# Altium PCB PCB1.PcbDoc
Units mm, origin at the board's own origin, x right, y up, seen from the top; angles counter-clockwise.
Board outline 114.6 x 81.6 mm, 2 copper layers (Top Layer, Bottom Layer); 60 components, 22 nets, 279 pads, 0 vias.
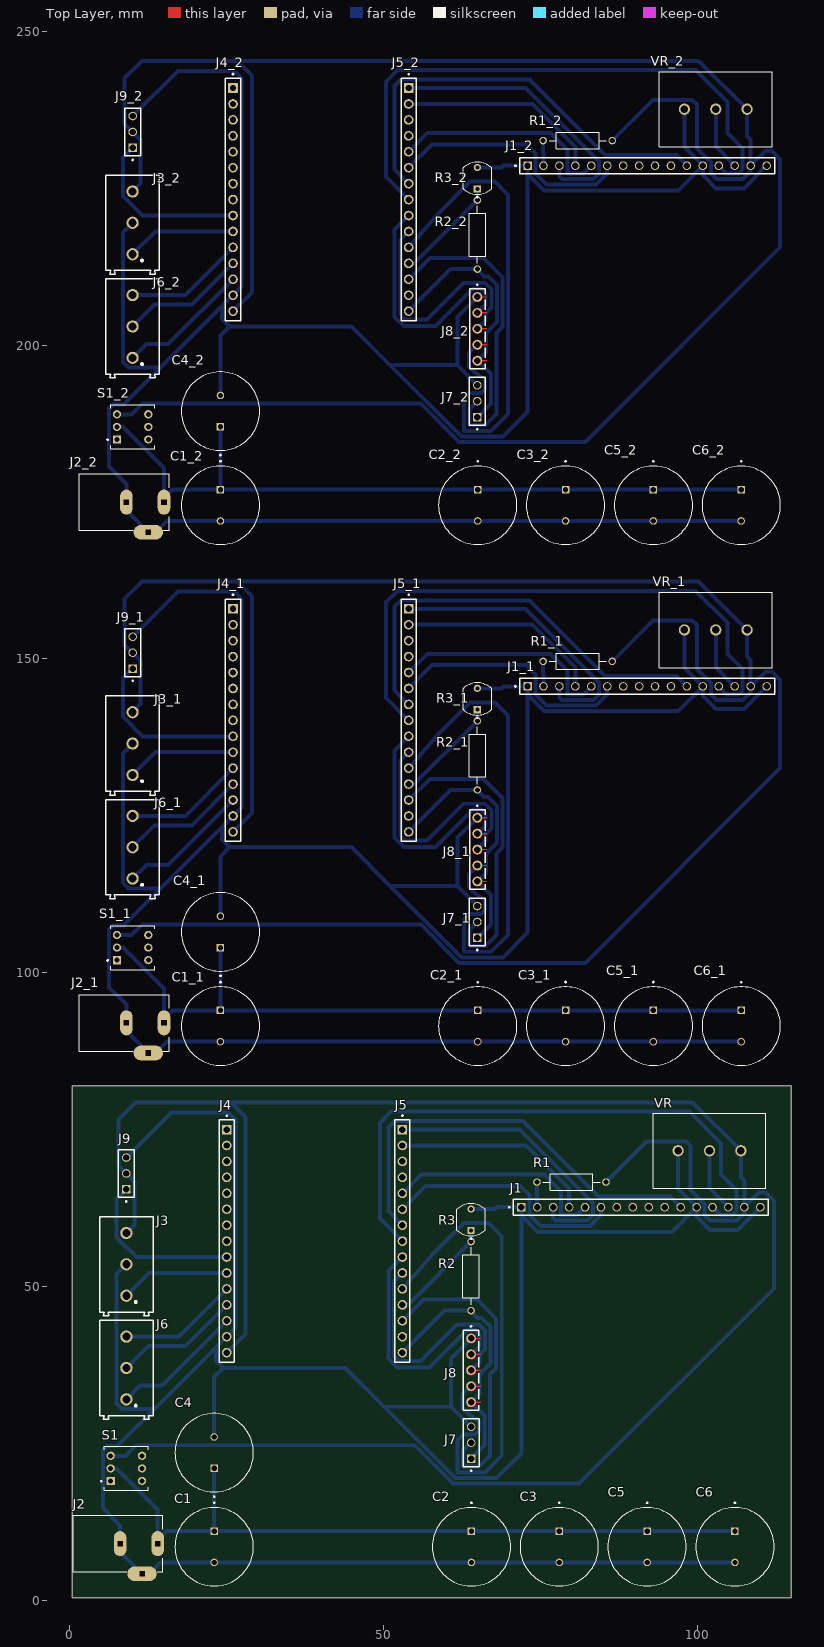
[diagram p0: Top Layer view]
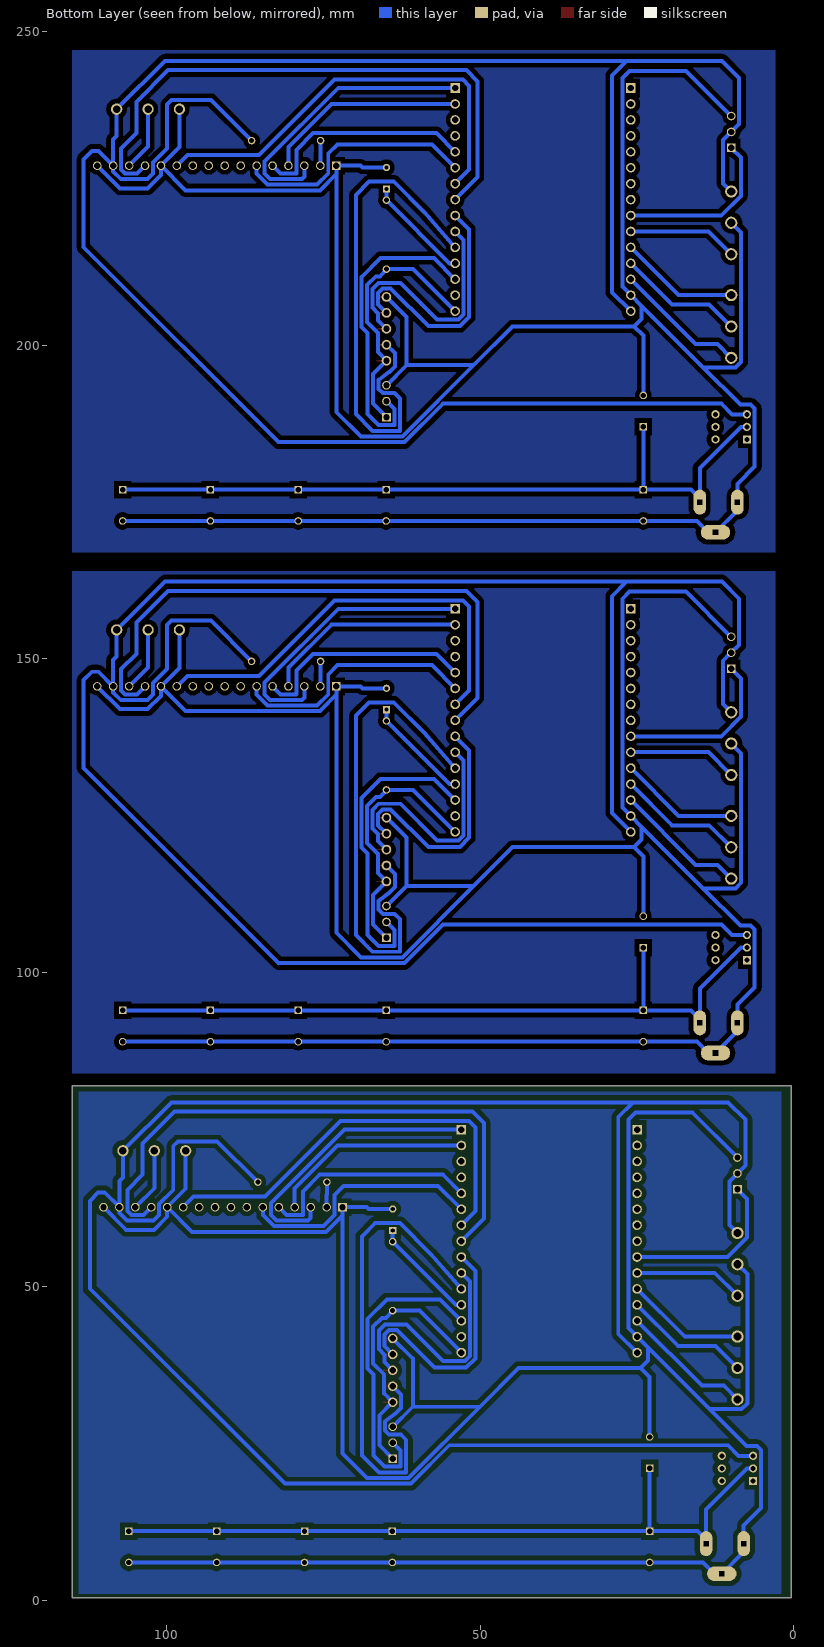
[diagram p1: Bottom Layer view, seen from below]

## Layer stack, top to bottom
Top Solder: solder mask 0.0102, Solder Resist, Dk 3.5
Top Layer: signal copper 0.0356
Dielectric 1: dielectric 0.32, FR-4, Dk 4.8
Bottom Layer: signal copper 0.0356
Bottom Solder: solder mask 0.0102, Solder Resist, Dk 3.5

## Board outline
0.4,0.4 115,0.4 115,82 0.4,82

## Design rules (kind name [scope] priority, off if disabled: settings)
Clearance [All] p1: gap=0.254 ignorepadtopadclearanceinfootprint=FALSE except(0.762: Arc-Fill Arc-Poly Arc-Region Track-Fill Track-Poly Track-Region SMDPad-Fill SMDPad-Poly SMDPad-Region THPad-Fill THPad-Poly THPad-Region Via-Fill Via-Poly Via-Region Fill-Fill Fill-Poly Fill-Region Poly-Poly Poly-Region Region-Region)
PolygonConnect [All] p1: connectstyle=Relief reliefconductorwidth=0.254 reliefentries=4 polygonreliefangle="90 Angle" airgapwidth=0.254
RoutingLayers [All] p1: top layer_v5=FALSE bottom layer_v5=TRUE
RoutingVias [All] p1: holewidth=0.711 width=1.27 viastyle="Through Hole" minholewidth=0.711 minwidth=1.27 maxholewidth=0.711 maxwidth=1.27
SolderMaskExpansion [All] p1: expansion=0.102 istentingtop=FALSE
Width [All] p1: maxlimit=1.016 minlimit=0.508 preferedwidth=0.635
29 further rules are at their usual default settings.

## Classes and differential pairs
component class Sheet1: C1 C2 C3 C4 C5 C6 J1 J2 J3 J4 J5 J6 J7 J8 J9 R1 R2 R3 S1 VR

## Components (designator, comment, footprint, x,y, rotation, side; value= is the part's Value field where it differs from the comment)
C1 "2200uF" CAPPRD500W60D1250H2000 23,8.5 r270 top
C1_1 "2200uF" CAPPRD500W60D1250H2000 24,91.5 r270 top (schematic designator C1)
C1_2 "2200uF" CAPPRD500W60D1250H2000 24,174.5 r270 top (schematic designator C1)
C2 "2200uF" CAPPRD500W60D1250H2000 64,8.5 r270 top
C2_1 "2200uF" CAPPRD500W60D1250H2000 65,91.5 r270 top (schematic designator C2)
C2_2 "2200uF" CAPPRD500W60D1250H2000 65,174.5 r270 top (schematic designator C2)
C3 "2200uF" CAPPRD500W60D1250H2000 78,8.5 r270 top
C3_1 "2200uF" CAPPRD500W60D1250H2000 79,91.5 r270 top (schematic designator C3)
C3_2 "2200uF" CAPPRD500W60D1250H2000 79,174.5 r270 top (schematic designator C3)
C4 "2200uF" CAPPRD500W60D1250H2000 23,23.5 r90 top
C4_1 "2200uF" CAPPRD500W60D1250H2000 24,106.5 r90 top (schematic designator C4)
C4_2 "2200uF" CAPPRD500W60D1250H2000 24,189.5 r90 top (schematic designator C4)
C5 "2200uF" CAPPRD500W60D1250H2000 92,8.5 r270 top
C5_1 "2200uF" CAPPRD500W60D1250H2000 93,91.5 r270 top (schematic designator C5)
C5_2 "2200uF" CAPPRD500W60D1250H2000 93,174.5 r270 top (schematic designator C5)
C6 "2200uF" CAPPRD500W60D1250H2000 106,8.5 r270 top
C6_1 "2200uF" CAPPRD500W60D1250H2000 107,91.5 r270 top (schematic designator C6)
C6_2 "2200uF" CAPPRD500W60D1250H2000 107,174.5 r270 top (schematic designator C6)
J1 "1602 LCD" SAMTEC_TSW-116-08-F-S 71.944,62.626 r0 top
J1_1 "1602 LCD" SAMTEC_TSW-116-08-F-S 72.944,145.626 r0 top (schematic designator J1)
J1_2 "1602 LCD" SAMTEC_TSW-116-08-F-S 72.944,228.626 r0 top (schematic designator J1)
J2 "DC-005" NINIGI_DC-005 11.5,9 r0 top
J2_1 "DC-005" NINIGI_DC-005 12.5,92 r0 top (schematic designator J2)
J2_2 "DC-005" NINIGI_DC-005 12.5,175 r0 top (schematic designator J2)
J3 "" 691213710003 9,53.519 r90 top
J3_1 "" 691213710003 10,136.519 r90 top (schematic designator J3)
J3_2 "" 691213710003 10,219.519 r90 top (schematic designator J3)
J4 "ESP32 NodeMCU left" SAMTEC_SSQ-115-X-X-S 25,57.22 r270 top
J4_1 "ESP32 NodeMCU left" SAMTEC_SSQ-115-X-X-S 26,140.22 r270 top (schematic designator J4)
J4_2 "ESP32 NodeMCU left" SAMTEC_SSQ-115-X-X-S 26,223.22 r270 top (schematic designator J4)
J5 "ESP32 NodeMCU right" SAMTEC_SSQ-115-X-X-S 53,57.22 r270 top
J5_1 "ESP32 NodeMCU right" SAMTEC_SSQ-115-X-X-S 54,140.22 r270 top (schematic designator J5)
J5_2 "ESP32 NodeMCU right" SAMTEC_SSQ-115-X-X-S 54,223.22 r270 top (schematic designator J5)
J6 "Relay module" 691213710003 9,37 r90 top
J6_1 "Relay module" 691213710003 10,120 r90 top (schematic designator J6)
J6_2 "Relay module" 691213710003 10,203 r90 top (schematic designator J6)
J7 "DHT11" SAMTEC_TSW-103-08-F-S 63.944,22.546 r90 top
J7_1 "DHT11" SAMTEC_TSW-103-08-F-S 64.944,105.546 r90 top (schematic designator J7)
J7_2 "DHT11" SAMTEC_TSW-103-08-F-S 64.944,188.546 r90 top (schematic designator J7)
J8 "R558S" SAMTEC_MTLW-105-05-G-S-190 63.944,36.626 r90 top
J8_1 "R558S" SAMTEC_MTLW-105-05-G-S-190 64.944,119.626 r90 top (schematic designator J8)
J8_2 "R558S" SAMTEC_MTLW-105-05-G-S-190 64.944,202.626 r90 top (schematic designator J8)
J9 "Servo" SAMTEC_TSW-103-08-F-S 9,65.46 r90 top
J9_1 "Servo" SAMTEC_TSW-103-08-F-S 10,148.46 r90 top (schematic designator J9)
J9_2 "Servo" SAMTEC_TSW-103-08-F-S 10,231.46 r90 top (schematic designator J9)
R1 "1K" RESAD1100W55L680D260 79.944,66.626 r180 top
R1_1 "1K" RESAD1100W55L680D260 80.944,149.626 r180 top (schematic designator R1)
R1_2 "1K" RESAD1100W55L680D260 80.944,232.626 r180 top (schematic designator R1)
R2 "10K" RESAD1100W55L680D260 63.944,51.626 r90 top
R2_1 "10K" RESAD1100W55L680D260 64.944,134.626 r90 top (schematic designator R2)
R2_2 "10K" RESAD1100W55L680D260 64.944,217.626 r90 top (schematic designator R2)
R3 "PDV-P8103" PHODET_PDV-P8103 63.944,60.626 r90 top
R3_1 "PDV-P8103" PHODET_PDV-P8103 64.944,143.626 r90 top (schematic designator R3)
R3_2 "PDV-P8103" PHODET_PDV-P8103 64.944,226.626 r90 top (schematic designator R3)
S1 "TL2230EEF100" SW_TL2230EEF100 9,21 r90 top
S1_1 "TL2230EEF100" SW_TL2230EEF100 10,104 r90 top (schematic designator S1)
S1_2 "TL2230EEF100" SW_TL2230EEF100 10,187 r90 top (schematic designator S1)
VR "10K" P160 101.944,71.626 r0 top
VR_1 "10K" P160 102.944,154.626 r0 top (schematic designator VR)
VR_2 "10K" P160 102.944,237.626 r0 top (schematic designator VR)

## Footprints (in the part's own frame and the unit in brackets; to place one, negate y for a bottom-side part, rotate by r counter-clockwise, add the part's x,y. Pads: shape width x height; smd on the part's side, far side on the other; paste and mask are expansions set on the pad)
691213710003 [mm]
  round 1.95 hole 1.3: 1(-5,0) 2(0,0) 3(5,0)
  silkscreen extent -8.2,-4.25 7.6,4.25
CAPPRD500W60D1250H2000 [mm]
  round 1.2 hole 0.85: N(2.5,0)
  rect 1.2x1.2 hole 0.85: P(-2.5,0)
  silkscreen extent -7.1,-6.25 6.25,6.25, body extent -6.25,-6.25 6.25,6.25, height 20
NINIGI_DC-005 [mm]
  oval 4.7x2.35 hole 0.8 square: 2(0,-4.8)
  oval 2x4 hole 0.8 square: 3(-3.5,0) 4(2.5,0)
  silkscreen extent -11,-4.5 3.3,4.5
P160 [mm]
  round 1.8 hole 1.2: 1(-5,0) 2(0,0) 3(5,0)
  silkscreen extent -9,-6 9,6
PHODET_PDV-P8103 [mm]
  rect 1.158x1.158 / inner round 1.158 / far side rect 1.158x1.158 hole 0.65: 1(-1.7,0)
  round 1.158 hole 0.65: 2(1.7,0)
  silkscreen extent -3.1,-2.27 2.58,2.27, body extent -2.54,-2.14 2.54,2.14, height 2.38
RESAD1100W55L680D260 [mm]
  round 1.2 hole 0.8: 1(-5.5,0) 2(5.5,0)
  silkscreen extent -4.58,-1.3 4.58,1.3, body extent -5.77,-1.2 5.77,1.2, height 2.4
SAMTEC_MTLW-105-05-G-S-190 [mm]
  round 1.52 hole 1.02: 01(5.08,0) 02(2.54,0) 03(0,0) 04(-2.54,0) 05(-5.08,0)
  Top Layer region: 5.159,0.756 5.238,0.743 5.315,0.723 5.389,0.694 5.46,0.658 5.527,0.615 5.589,0.565 5.645,0.509 5.695,0.447 5.738,0.38 5.774,0.309 5.803,0.235 5.823,0.158 5.836,0.079 5.84,0 5.839,-0.038 5.836,-0.076 5.832,-0.113 5.825,-0.151 5.817,-0.187 5.807,-0.224 5.795,-0.259 5.781,-0.294 5.766,-0.329 5.749,-0.363 5.73,-0.395 5.71,-0.427 5.688,-0.458 5.665,-0.487 5.64,-0.516 5.614,-0.543 5.586,-0.569 5.557,-0.593 5.528,-0.616 5.497,-0.638 5.465,-0.658 5.432,-0.676 5.398,-0.692 5.363,-0.707 5.328,-0.721 5.292,-0.732 5.256,-0.742 5.219,-0.75 5.182,-0.756 5.145,-0.76 5.145,-1.53 5.015,-1.53 5.015,-0.76 4.978,-0.756 4.941,-0.75 4.904,-0.742 4.868,-0.732 4.832,-0.721 4.797,-0.707 4.762,-0.692 4.728,-0.676 4.695,-0.658 4.663,-0.638 4.632,-0.616 4.603,-0.593 4.574,-0.569 4.546,-0.543 4.52,-0.516 4.495,-0.487 4.472,-0.458 4.45,-0.427 4.43,-0.395 4.411,-0.363 4.394,-0.329 4.379,-0.294 4.365,-0.259 4.353,-0.224 4.343,-0.187 4.335,-0.151 4.328,-0.113 4.324,-0.076 4.321,-0.038 4.32,0 4.324,0.079 4.337,0.158 4.357,0.235 4.386,0.309 4.422,0.38 4.465,0.447 4.515,0.509 4.571,0.565 4.633,0.615 4.7,0.658 4.771,0.694 4.845,0.723 4.922,0.743 5.001,0.756 5.08,0.76
  Top Layer region: 2.619,0.756 2.698,0.743 2.775,0.723 2.849,0.694 2.92,0.658 2.987,0.615 3.049,0.565 3.105,0.509 3.155,0.447 3.198,0.38 3.234,0.309 3.263,0.235 3.283,0.158 3.296,0.079 3.3,0 3.299,-0.038 3.296,-0.076 3.292,-0.113 3.285,-0.151 3.277,-0.187 3.267,-0.224 3.255,-0.259 3.241,-0.294 3.226,-0.329 3.209,-0.363 3.19,-0.395 3.17,-0.427 3.148,-0.458 3.125,-0.487 3.1,-0.516 3.074,-0.543 3.046,-0.569 3.017,-0.593 2.988,-0.616 2.957,-0.638 2.925,-0.658 2.892,-0.676 2.858,-0.692 2.823,-0.707 2.788,-0.721 2.752,-0.732 2.716,-0.742 2.679,-0.75 2.642,-0.756 2.605,-0.76 2.605,-1.53 2.475,-1.53 2.475,-0.76 2.438,-0.756 2.401,-0.75 2.364,-0.742 2.328,-0.732 2.292,-0.721 2.257,-0.707 2.222,-0.692 2.188,-0.676 2.155,-0.658 2.123,-0.638 2.092,-0.616 2.063,-0.593 2.034,-0.569 2.006,-0.543 1.98,-0.516 1.955,-0.487 1.932,-0.458 1.91,-0.427 1.89,-0.395 1.871,-0.363 1.854,-0.329 1.839,-0.294 1.825,-0.259 1.813,-0.224 1.803,-0.187 1.795,-0.151 1.788,-0.113 1.784,-0.076 1.781,-0.038 1.78,0 1.784,0.079 1.797,0.158 1.817,0.235 1.846,0.309 1.882,0.38 1.925,0.447 1.975,0.509 2.031,0.565 2.093,0.615 2.16,0.658 2.231,0.694 2.305,0.723 2.382,0.743 2.461,0.756 2.54,0.76
  Top Layer region: 0.079,0.756 0.158,0.743 0.235,0.723 0.309,0.694 0.38,0.658 0.447,0.615 0.509,0.565 0.565,0.509 0.615,0.447 0.658,0.38 0.694,0.309 0.723,0.235 0.743,0.158 0.756,0.079 0.76,0 0.759,-0.038 0.756,-0.076 0.752,-0.113 0.745,-0.151 0.737,-0.187 0.727,-0.224 0.715,-0.259 0.701,-0.294 0.686,-0.329 0.669,-0.363 0.65,-0.395 0.63,-0.427 0.608,-0.458 0.585,-0.487 0.56,-0.516 0.534,-0.543 0.506,-0.569 0.477,-0.593 0.448,-0.616 0.417,-0.638 0.385,-0.658 0.352,-0.676 0.318,-0.692 0.283,-0.707 0.248,-0.721 0.212,-0.732 0.176,-0.742 0.139,-0.75 0.102,-0.756 0.065,-0.76 0.065,-1.53 -0.065,-1.53 -0.065,-0.76 -0.102,-0.756 -0.139,-0.75 -0.176,-0.742 -0.212,-0.732 -0.248,-0.721 -0.283,-0.707 -0.318,-0.692 -0.352,-0.676 -0.385,-0.658 -0.417,-0.638 -0.448,-0.616 -0.477,-0.593 -0.506,-0.569 -0.534,-0.543 -0.56,-0.516 -0.585,-0.487 -0.608,-0.458 -0.63,-0.427 -0.65,-0.395 -0.669,-0.363 -0.686,-0.329 -0.701,-0.294 -0.715,-0.259 -0.727,-0.224 -0.737,-0.187 -0.745,-0.151 -0.752,-0.113 -0.756,-0.076 -0.759,-0.038 -0.76,0 -0.756,0.079 -0.743,0.158 -0.723,0.235 -0.694,0.309 -0.658,0.38 -0.615,0.447 -0.565,0.509 -0.509,0.565 -0.447,0.615 -0.38,0.658 -0.309,0.694 -0.235,0.723 -0.158,0.743 -0.079,0.756 0,0.76
  Top Layer region: -2.461,0.756 -2.382,0.743 -2.305,0.723 -2.231,0.694 -2.16,0.658 -2.093,0.615 -2.031,0.565 -1.975,0.509 -1.925,0.447 -1.882,0.38 -1.846,0.309 -1.817,0.235 -1.797,0.158 -1.784,0.079 -1.78,0 -1.781,-0.038 -1.784,-0.076 -1.788,-0.113 -1.795,-0.151 -1.803,-0.187 -1.813,-0.224 -1.825,-0.259 -1.839,-0.294 -1.854,-0.329 -1.871,-0.363 -1.89,-0.395 -1.91,-0.427 -1.932,-0.458 -1.955,-0.487 -1.98,-0.516 -2.006,-0.543 -2.034,-0.569 -2.063,-0.593 -2.092,-0.616 -2.123,-0.638 -2.155,-0.658 -2.188,-0.676 -2.222,-0.692 -2.257,-0.707 -2.292,-0.721 -2.328,-0.732 -2.364,-0.742 -2.401,-0.75 -2.438,-0.756 -2.475,-0.76 -2.475,-1.53 -2.605,-1.53 -2.605,-0.76 -2.642,-0.756 -2.679,-0.75 -2.716,-0.742 -2.752,-0.732 -2.788,-0.721 -2.823,-0.707 -2.858,-0.692 -2.892,-0.676 -2.925,-0.658 -2.957,-0.638 -2.988,-0.616 -3.017,-0.593 -3.046,-0.569 -3.074,-0.543 -3.1,-0.516 -3.125,-0.487 -3.148,-0.458 -3.17,-0.427 -3.19,-0.395 -3.209,-0.363 -3.226,-0.329 -3.241,-0.294 -3.255,-0.259 -3.267,-0.224 -3.277,-0.187 -3.285,-0.151 -3.292,-0.113 -3.296,-0.076 -3.299,-0.038 -3.3,0 -3.296,0.079 -3.283,0.158 -3.263,0.235 -3.234,0.309 -3.198,0.38 -3.155,0.447 -3.105,0.509 -3.049,0.565 -2.987,0.615 -2.92,0.658 -2.849,0.694 -2.775,0.723 -2.698,0.743 -2.619,0.756 -2.54,0.76
  Top Layer region: -5.001,0.756 -4.922,0.743 -4.845,0.723 -4.771,0.694 -4.7,0.658 -4.633,0.615 -4.571,0.565 -4.515,0.509 -4.465,0.447 -4.422,0.38 -4.386,0.309 -4.357,0.235 -4.337,0.158 -4.324,0.079 -4.32,0 -4.321,-0.038 -4.324,-0.076 -4.328,-0.113 -4.335,-0.151 -4.343,-0.187 -4.353,-0.224 -4.365,-0.259 -4.379,-0.294 -4.394,-0.329 -4.411,-0.363 -4.43,-0.395 -4.45,-0.427 -4.472,-0.458 -4.495,-0.487 -4.52,-0.516 -4.546,-0.543 -4.574,-0.569 -4.603,-0.593 -4.632,-0.616 -4.663,-0.638 -4.695,-0.658 -4.728,-0.676 -4.762,-0.692 -4.797,-0.707 -4.832,-0.721 -4.868,-0.732 -4.904,-0.742 -4.941,-0.75 -4.978,-0.756 -5.015,-0.76 -5.015,-1.53 -5.145,-1.53 -5.145,-0.76 -5.182,-0.756 -5.219,-0.75 -5.256,-0.742 -5.292,-0.732 -5.328,-0.721 -5.363,-0.707 -5.398,-0.692 -5.432,-0.676 -5.465,-0.658 -5.497,-0.638 -5.528,-0.616 -5.557,-0.593 -5.586,-0.569 -5.614,-0.543 -5.64,-0.516 -5.665,-0.487 -5.688,-0.458 -5.71,-0.427 -5.73,-0.395 -5.749,-0.363 -5.766,-0.329 -5.781,-0.294 -5.795,-0.259 -5.807,-0.224 -5.817,-0.187 -5.825,-0.151 -5.832,-0.113 -5.836,-0.076 -5.839,-0.038 -5.84,0 -5.836,0.079 -5.823,0.158 -5.803,0.235 -5.774,0.309 -5.738,0.38 -5.695,0.447 -5.645,0.509 -5.589,0.565 -5.527,0.615 -5.46,0.658 -5.389,0.694 -5.315,0.723 -5.238,0.743 -5.159,0.756 -5.08,0.76
  silkscreen extent -6.35,-1.24 7.1,1.24
SAMTEC_SSQ-115-X-X-S [mm]
  rect 1.53x1.53 hole 1.02: 01(-17.78,0)
  round 1.53 hole 1.02: 02(-15.24,0) 03(-12.7,0) 04(-10.16,0) 05(-7.62,0) 06(-5.08,0) 07(-2.54,0) 08(0,0) 09(2.54,0) 10(5.08,0) 11(7.62,0) 12(10.16,0) 13(12.7,0) 14(15.24,0) 15(17.78,0)
  silkscreen extent -20.1,-1.2 19.31,1.2
SAMTEC_TSW-103-08-F-S [mm]
  rect 1.37x1.37 hole 1.02: 01(0,0)
  round 1.37 hole 1.02: 02(2.54,0) 03(5.08,0)
  silkscreen extent -2.02,-1.27 6.35,1.27
SAMTEC_TSW-116-08-F-S [mm]
  rect 1.37x1.37 hole 1.02: 01(0,0)
  round 1.37 hole 1.02: 02(2.54,0) 03(5.08,0) 04(7.62,0) 05(10.16,0) 06(12.7,0) 07(15.24,0) 08(17.78,0) 09(20.32,0) 10(22.86,0) 11(25.4,0) 12(27.94,0) 13(30.48,0) 14(33.02,0) 15(35.56,0) 16(38.1,0)
  silkscreen extent -2.02,-1.27 39.37,1.27
SW_TL2230EEF100 [mm]
  rect 1.308x1.308 / inner round 1.308 / far side rect 1.308x1.308 hole 0.8: 1(-2,2.5)
  round 1.308 hole 0.8: 2(0,2.5) 3(2,2.5) 4(-2,-2.5) 5(0,-2.5) 6(2,-2.5)
  silkscreen extent -3.5,-3.5 3.5,4.1, body extent -3.5,-3.5 3.5,3.5, height 12.5

## Part data
C1 C1_1 C1_2 C2 C2_1 C2_2 C3 C3_1 C3_2 C4 C4_1 C4_2 C5 C5_1 C5_2 C6 C6_1 C6_2: library part EEUFR1C222, "Cap Aluminum Lytic 2200uF 16V 20% (12.5 X 20mm) Radial 5mm 2600mA 10000h 105C Bulk", Package="RADIAL-2 Panasonic", Availability="In Stock", Check_prices=https://www.snapeda.com/parts/EEUFR1C222/Panasonic/view-part/1469066/?ref=eda, MF=Panasonic, MP=EEUFR1C222, Price=None, SnapEDA_Link=https://www.snapeda.com/parts/EEUFR1C222/Panasonic/view-part/1469066/?ref=snap
J1 J1_1 J1_2: library part TSW-116-08-F-S, Package=None, Availability=Unavailable, MP=TSW-116-08-F-S, Price=None
J2 J2_1 J2_2: "DC Jack", Package=None, Availability=Unavailable, MP=DC-005, Price=None
J3 J3_1 J3_2 J6 J6_1 J6_2: library part 691213710003, "Serie 213 - 5,0mm pitch - Modular THT - Green - Horizontal cable entry Rising Cage Clamp 10mm height - 03p", Package=None, Check_prices=https://www.snapeda.com/parts/691213710003/Wurth+Electronics/view-part/?ref=eda, MF="Wurth Electronics", MP=691213710003, SnapEDA_Link=https://www.snapeda.com/parts/691213710003/Wurth+Electronics/view-part/?ref=snap
J4 J4_1 J4_2 J5 J5_1 J5_2: library part SSQ-115-X-X-S, "15 Position Receptacle Connector 0.100 (2.54mm) Through Hole Gold", Package=None, Availability="Not in stock", Check_prices=https://www.snapeda.com/parts/SSQ-115-23-G-S/Samtec/view-part/3249452/?ref=eda, MF=Samtec, MP=SSQ-115-23-G-S, Price=None, Purchase-URL=https://pricing.snapeda.com/search/part/SSQ-115-23-G-S/?ref=eda, SnapEDA_Link=https://www.snapeda.com/parts/SSQ-115-23-G-S/Samtec/view-part/3249452/?ref=snap
J7 J7_1 J7_2 J9 J9_1 J9_2: library part TSW-103-08-F-S, Package=None, Availability=Unavailable, MP=TSW-103-08-F-S, Price=None
J8 J8_1 J8_2: library part MTLW-105-05-G-S-190, Package=None, Availability=Unavailable, MP=MTLW-105-05-G-S-190, Price=None
R1 R1_1 R1_2 R2 R2_1 R2_2: library part MFR-25FBF52-1K, "1.07 kOhms Â±1% 0.25W, 1/4W Through Hole Resistor Axial - Metal Film", Package="RADIAL-2 YAGEO", Check_prices=https://www.snapeda.com/parts/MFR-25FBF52-1K/Yageo/view-part/?ref=eda, MF=Yageo, MP=MFR-25FBF52-1K, SnapEDA_Link=https://www.snapeda.com/parts/MFR-25FBF52-1K/Yageo/view-part/?ref=snap
R3 R3_1 R3_2: "CdS Cells 520nm 16 ~ 33kOhms @ 10 lux", Package="Radial Advanced Photonix", Check_prices=https://www.snapeda.com/parts/PDV-P8103/Advanced+Photonix/view-part/?ref=eda, MF="Advanced Photonix", MP=PDV-P8103, SnapEDA_Link=https://www.snapeda.com/parts/PDV-P8103/Advanced+Photonix/view-part/?ref=snap
S1 S1_1 S1_2: "Pushbutton Switch DPDT Standard Through Hole", Package=None, Check_prices=https://www.snapeda.com/parts/TL2230EEF100/E-Switch/view-part/?ref=eda, MF=E-Switch, MP=TL2230EEF100, SnapEDA_Link=https://www.snapeda.com/parts/TL2230EEF100/E-Switch/view-part/?ref=snap
VR VR_1 VR_2: library part P160KN-0QC15B500K, "500k Ohm 1 Gang Linear Panel Mount Potentiometer None 1 Turn Conductive Plastic 0.2W, 1/5W PC Pins", Package=None, Digi-Key_Part_Number=987-1304-ND, Digi-Key_Purchase_URL=https://www.digikey.cz/product-detail/en/tt-electronics-bi/P160KN-0QC15B500K/987-1304-ND/2408881?utm_source=snapeda&utm_medium=aggregator&utm_campaign=symbol, MF="TT Electronics/BI", MP=P160KN-0QC15B500K, SnapEDA_Link=https://www.snapeda.com/parts/P160KN-0QC15B500K/TT%20Electronics/BI/view-part/903272/?ref=snap

## Nets (pads, with @x,y where several pads share a name; then routed paths per layer and width w, separated by ;. In a path a pad name is that pad's centre, name@x,y a point inside that pad or via, vN(x,y) a via of type N, cw(c..) or ccw(c..) an arc to the next point about the centre after c; other vN are vias at no path point)
3.3V: J5.15 J7.01 J8.05 R2.1 | length 42
  Bottom Layer w0.635: J5.15 59.686,46.126 R2.1 63.944,46.056 65,45 65.634,45 67.054,43.58 67.054,37.683 65.297,35.926 65.297,32.899 J8.05 66.09,29.401 66.09,24.692 J7.01
5V: J1.15 J3.3 J4.15 J9.02 R1.1 S1.3 VR.3 | length 353.2
  Bottom Layer w0.635: S1.3 8.852,23 10.535,24.682 54.934,24.682 61.055,18.561 81.147,18.561 112.211,49.625 112.211,63.646 110.89,64.967 109.845,64.967 J1.15 ; J3.3 10.281,59.8 10.281,66.719 J9.02 7.741,69.259 7.741,76.6 10.484,79.343 25.657,79.343 ; J4.15 28,42.44 28,77 25.657,79.343 ; R1.1 91.938,73.12 98.19,73.12 98.927,72.384 98.927,65.373 101.162,63.138 101.162,61.37 102.061,60.471 106.293,60.471 107.504,61.683 J1.15 ; 25.657,79.343 99.227,79.343 VR.3 106.944,67.381 107.504,66.821 J1.15
5V_BULK: C1.P C2.P C3.P C4.P C5.P C6.P J2.4 S1.2 | length 118.2
  Bottom Layer w0.635: S1.2 7.461,21 14,14.461 J2.4@14,9.631 ; J2.4 J2.4@14,9.631 ; C4.P C1.P ; C6.P C5.P C3.P C2.P C1.P ; J2.4@14,9.631 15.369,11 C1.P
D4: J1.06 J5.06 | length 39.7
  Bottom Layer w0.635: J5.06 56.713,66.013 71.77,66.013 73.222,64.56 73.222,61.37 75,59.592 82.876,59.592 84.644,61.36 J1.06
D5: J1.05 J5.05 | length 35.7
  Bottom Layer w0.635: J5.05 55.958,67.798 75.616,67.798 78.281,65.133 78.281,61.416 78.327,61.37 80.848,61.37 J1.05
D6: J1.04 J5.02 | length 32.4
  Bottom Layer w0.635: J5.02 72.731,72.46 79.564,65.627 J1.04
D7: J1.03 J5.01 | length 45.7
  Bottom Layer w0.635: J5.01 71.626,75 83.361,63.265 83.361,61.37 82.472,60.481 77.419,60.481 77.024,60.875 J1.03
DHT: J5.13 J7.02 | length 49.2
  Bottom Layer w0.635: J5.13 56.378,47.898 64.891,47.898 67.943,44.846 67.943,36.946 66.979,35.982 66.979,23.037 65.221,21.279 62.681,21.279 62.681,23.823 J7.02
E: J1.11 J5.07 | length 69.2
  Bottom Layer w0.635: J5.07 50.768,61.992 50.768,75.33 51.775,76.337 72.241,76.337 84.271,64.306 95.664,64.306 J1.11
GND: C1.N C2.N C3.N C4.N C5.N C6.N J1.01 J1.12 J1.16 J2.2 J2.3 J3.2 J4.14 J7.03 J8.01 J9.03 R3.2 VR.1 | length 431.4
  Bottom Layer w0.635: J3.2 7.436,51.955 7.436,31.337 8.325,30.448 13.468,30.448 ; J9.03 16.203,77.743 25.216,77.743 26.359,76.6 26.359,43.339 J4.14 23.26,40.24 ; C4.N 23,35.532 24.468,37 ; J7.03 60.75,30.82 ; J8.01 60.75,38.512 60.75,30.82 ; R3.2 67.786,62.326 68.086,62.626 J1.01 71.944,61.327 ; VR.1 96.944,65.566 J1.12 ; C6.N C5.N C3.N C2.N C1.N 14.475,6 12.675,4.2 J2.2 8,7.7 J2.3 8,11.926 5.251,14.675 5.251,23.895 5.886,24.53 7.55,24.53 13.468,30.448 ; J1.16 106.418,59 102,59 99.884,61.116 J1.12 ; 13.468,30.448 23.26,40.24 ; 23.26,40.24 23.26,38.208 24.468,37 ; 24.468,37 43.874,37 50.054,30.82 ; 50.054,30.82 61.424,19.45 68.015,19.45 71.944,23.379 71.944,61.327 ; 50.054,30.82 60.75,30.82 ; 71.944,61.327 74.568,58.703 95.961,58.703 J1.12
IN1: J3.1 J4.10 | length 17.5
  Bottom Layer w0.635: J3.1 12.621,52.14 J4.10
IN2: J4.11 J6.3 | length 19.1
  Bottom Layer w0.635: J6.3 17.4,42 J4.11
IN3: J4.12 J6.2 | length 20.2
  Bottom Layer w0.635: J6.2 12.499,40.499 18.439,40.499 J4.12
IN4: J4.13 J6.1 | length 21.2
  Bottom Layer w0.635: J6.1 11.182,34.182 14.662,34.182 J4.13
LDR: J5.12 R2.2 R3.1 | length 16.9
  Bottom Layer w0.635: J5.12 53.878,47.06 R2.2 R3.1
NetJ1_02: J1.02 R1.2 | length 4
  Bottom Layer w0.635: R1.2 74.444,64.626 74.484,64.586 J1.02
NetJ1_14: J1.14 VR.2 | length 10.3
  Bottom Layer w0.635: VR.2 101.944,65.646 J1.14
RS: J1.13 J5.08 | length 94
  Bottom Layer w0.635: J5.08 49.422,60.798 49.422,76.067 51.2,77.845 98.749,77.845 103.803,72.79 103.803,67.812 106.242,65.373 106.242,61.995 105.607,61.36 103.69,61.36 J1.13
RX: J5.09 J8.02 | length 38.7
  Bottom Layer w0.635: J5.09 50.768,52.448 50.768,38.524 52.24,37.052 57.279,37.052 63.265,43.038 64.548,43.038 65.276,42.31 65.276,40.498 J8.02
SERVO: J4.09 J9.01 | length 27.1
  Bottom Layer w0.635: J9.01 7.453,63.914 7.453,57.812 10.585,54.68 J4.09
TOUCH: J5.11 J8.04 | length 82.4
  Bottom Layer w0.635: J5.11 57.897,55.192 62.782,60.077 66.733,60.077 68.832,57.978 68.832,23.036 66.135,20.339 61.792,20.339 61.792,25.521 62.63,26.359 64.51,26.359 65.201,27.05 65.201,28.462 63.468,29.762 62.601,30.63 62.601,32.743 J8.04
TX: J5.10 J8.03 | length 38.7
  Bottom Layer w0.635: J5.10 51.657,50.797 51.657,38.893 52.446,38.104 55.9,38.104 61.724,43.927 65.183,43.927 66.165,42.945 66.165,39.988 65.276,39.099 65.276,37.958 J8.03
pads on no net: C1_1.N C1_1.P C1_2.N C1_2.P C2_1.N C2_1.P C2_2.N C2_2.P C3_1.N C3_1.P C3_2.N C3_2.P C4_1.N C4_1.P C4_2.N C4_2.P C5_1.N C5_1.P C5_2.N C5_2.P C6_1.N C6_1.P C6_2.N C6_2.P J1.07 J1.08 J1.09 J1.10 J1_1.01 J1_1.02 J1_1.03 J1_1.04 J1_1.05 J1_1.06 J1_1.07 J1_1.08 J1_1.09 J1_1.10 J1_1.11 J1_1.12 J1_1.13 J1_1.14 J1_1.15 J1_1.16 J1_2.01 J1_2.02 J1_2.03 J1_2.04 J1_2.05 J1_2.06 J1_2.07 J1_2.08 J1_2.09 J1_2.10 J1_2.11 J1_2.12 J1_2.13 J1_2.14 J1_2.15 J1_2.16 J2_1.2 J2_1.3 J2_1.4 J2_2.2 J2_2.3 J2_2.4 J3_1.1 J3_1.2 J3_1.3 J3_2.1 J3_2.2 J3_2.3 J4.01 J4.02 J4.03 J4.04 J4.05 J4.06 J4.07 J4.08 J4_1.01 J4_1.02 J4_1.03 J4_1.04 J4_1.05 J4_1.06 J4_1.07 J4_1.08 J4_1.09 J4_1.10 J4_1.11 J4_1.12 J4_1.13 J4_1.14 J4_1.15 J4_2.01 J4_2.02 J4_2.03 J4_2.04 J4_2.05 J4_2.06 J4_2.07 J4_2.08 J4_2.09 J4_2.10 J4_2.11 J4_2.12 J4_2.13 J4_2.14 J4_2.15 J5.03 J5.04 J5.14 J5_1.01 J5_1.02 J5_1.03 J5_1.04 J5_1.05 J5_1.06 J5_1.07 J5_1.08 J5_1.09 J5_1.10 J5_1.11 J5_1.12 J5_1.13 J5_1.14 J5_1.15 J5_2.01 J5_2.02 J5_2.03 J5_2.04 J5_2.05 J5_2.06 J5_2.07 J5_2.08 J5_2.09 J5_2.10 J5_2.11 J5_2.12 J5_2.13 J5_2.14 J5_2.15 J6_1.1 J6_1.2 J6_1.3 J6_2.1 J6_2.2 J6_2.3 J7_1.01 J7_1.02 J7_1.03 J7_2.01 J7_2.02 J7_2.03 J8_1.01 J8_1.02 J8_1.03 J8_1.04 J8_1.05 J8_2.01 J8_2.02 J8_2.03 J8_2.04 J8_2.05 J9_1.01 J9_1.02 J9_1.03 J9_2.01 J9_2.02 J9_2.03 R1_1.1 R1_1.2 R1_2.1 R1_2.2 R2_1.1 R2_1.2 R2_2.1 R2_2.2 R3_1.1 R3_1.2 R3_2.1 R3_2.2 S1.1 S1.4 S1.5 S1.6 S1_1.1 S1_1.2 S1_1.3 S1_1.4 S1_1.5 S1_1.6 S1_2.1 S1_2.2 S1_2.3 S1_2.4 S1_2.5 S1_2.6 VR_1.1 VR_1.2 VR_1.3 VR_2.1 VR_2.2 VR_2.3
copper on no net: | length 3213.5
  Bottom Layer w0.635: 7.5,104 8.461,104 15,97.461 15,92.631 ; 7.5,106 9.852,106 11.535,107.682 55.934,107.682 62.055,101.561 82.147,101.561 113.211,132.625 113.211,146.646 111.89,147.967 110.845,147.967 108.504,145.626 ; 7.5,187 8.461,187 15,180.461 15,175.631 ; 7.5,189 9.852,189 11.535,190.682 55.934,190.682 62.055,184.561 82.147,184.561 113.211,215.625 113.211,229.646 111.89,230.967 110.845,230.967 108.504,228.626 ; 10,115 12.182,117.182 15.662,117.182 26,127.52 ; 10,120 13.499,123.499 19.439,123.499 26,130.06 ; 10,125 18.4,125 26,132.6 ; 10,131.519 13.621,135.14 26,135.14 ; 10,136.519 8.436,134.955 8.436,114.337 9.325,113.448 14.468,113.448 ; 10,141.519 11.281,142.8 11.281,149.719 10,151 8.741,152.259 8.741,159.6 11.484,162.343 26.657,162.343 ; 10,148.46 8.453,146.914 8.453,140.812 11.585,137.68 26,137.68 ; 10,153.54 17.203,160.743 26.216,160.743 27.359,159.6 27.359,126.339 26,124.98 24.26,123.24 ; 10,198 12.182,200.182 15.662,200.182 26,210.52 ; 10,203 13.499,206.499 19.439,206.499 26,213.06 ; 10,208 18.4,208 26,215.6 ; 10,214.519 13.621,218.14 26,218.14 ; 10,219.519 8.436,217.955 8.436,197.337 9.325,196.448 14.468,196.448 ; 10,224.519 11.281,225.8 11.281,232.719 10,234 8.741,235.259 8.741,242.6 11.484,245.343 26.657,245.343 ; 10,231.46 8.453,229.914 8.453,223.812 11.585,220.68 26,220.68 ; 10,236.54 17.203,243.743 26.216,243.743 27.359,242.6 27.359,209.339 26,207.98 24.26,206.24 ; 15,92 15,92.631 ; 15,175 15,175.631 ; 24,104 24,94 ; 24,109 24,118.532 25.468,120 ; 24,187 24,177 ; 24,192 24,201.532 25.468,203 ; 26,122.44 29,125.44 29,160 26.657,162.343 ; 26,205.44 29,208.44 29,243 26.657,245.343 ; 54,122.44 60.686,129.126 64.944,129.126 64.944,129.056 66,128 66.634,128 68.054,126.58 68.054,120.683 66.297,118.926 66.297,115.899 64.944,114.546 67.09,112.401 67.09,107.692 64.944,105.546 ; 54,127.52 57.378,130.898 65.891,130.898 68.943,127.846 68.943,119.946 67.979,118.982 67.979,106.037 66.221,104.279 63.681,104.279 63.681,106.823 64.944,108.086 ; 54,130.06 54.878,130.06 64.944,140.126 64.944,141.926 ; 54,132.6 58.897,138.192 63.782,143.077 67.733,143.077 69.832,140.978 69.832,106.036 67.135,103.339 62.792,103.339 62.792,108.521 63.63,109.359 65.51,109.359 66.201,110.05 66.201,111.462 64.468,112.762 63.601,113.63 63.601,115.743 64.944,117.086 ; 54,135.14 52.657,133.797 52.657,121.893 53.446,121.104 56.9,121.104 62.724,126.927 66.183,126.927 67.165,125.945 67.165,122.988 66.276,122.099 66.276,120.958 64.944,119.626 ; 54,137.68 51.768,135.448 51.768,121.524 53.24,120.052 58.279,120.052 64.265,126.038 65.548,126.038 66.276,125.31 66.276,123.498 64.944,122.166 ; 54,140.22 50.422,143.798 50.422,159.067 52.2,160.845 99.749,160.845 104.803,155.79 104.803,150.812 107.242,148.373 107.242,144.995 106.607,144.36 104.69,144.36 103.424,145.626 ; 54,142.76 51.768,144.992 51.768,158.33 52.775,159.337 73.241,159.337 85.271,147.306 96.664,147.306 98.344,145.626 ; 54,145.3 57.713,149.013 72.77,149.013 74.222,147.56 74.222,144.37 76,142.592 83.876,142.592 85.644,144.36 85.644,145.626 ; 54,147.84 56.958,150.798 76.616,150.798 79.281,148.133 79.281,144.416 79.327,144.37 81.848,144.37 83.104,145.626 ; 54,155.46 73.731,155.46 80.564,148.627 80.564,145.626 ; 54,158 72.626,158 84.361,146.265 84.361,144.37 83.472,143.481 78.419,143.481 78.024,143.875 78.024,145.626 ; 54,205.44 60.686,212.126 64.944,212.126 64.944,212.056 66,211 66.634,211 68.054,209.58 68.054,203.683 66.297,201.926 66.297,198.899 64.944,197.546 67.09,195.401 67.09,190.692 64.944,188.546 ; 54,210.52 57.378,213.898 65.891,213.898 68.943,210.846 68.943,202.946 67.979,201.982 67.979,189.037 66.221,187.279 63.681,187.279 63.681,189.823 64.944,191.086 ; 54,213.06 54.878,213.06 64.944,223.126 64.944,224.926 ; 54,215.6 58.897,221.192 63.782,226.077 67.733,226.077 69.832,223.978 69.832,189.036 67.135,186.339 62.792,186.339 62.792,191.521 63.63,192.359 65.51,192.359 66.201,193.05 66.201,194.462 64.468,195.762 63.601,196.63 63.601,198.743 64.944,200.086 ; 54,218.14 52.657,216.797 52.657,204.893 53.446,204.104 56.9,204.104 62.724,209.927 66.183,209.927 67.165,208.945 67.165,205.988 66.276,205.099 66.276,203.958 64.944,202.626 ; 54,220.68 51.768,218.448 51.768,204.524 53.24,203.052 58.279,203.052 64.265,209.038 65.548,209.038 66.276,208.31 66.276,206.498 64.944,205.166 ; 54,223.22 50.422,226.798 50.422,242.067 52.2,243.845 99.749,243.845 104.803,238.79 104.803,233.812 107.242,231.373 107.242,227.995 106.607,227.36 104.69,227.36 103.424,228.626 ; 54,225.76 51.768,227.992 51.768,241.33 52.775,242.337 73.241,242.337 85.271,230.306 96.664,230.306 98.344,228.626 ; 54,228.3 57.713,232.013 72.77,232.013 74.222,230.56 74.222,227.37 76,225.592 83.876,225.592 85.644,227.36 85.644,228.626 ; 54,230.84 56.958,233.798 76.616,233.798 79.281,231.133 79.281,227.416 79.327,227.37 81.848,227.37 83.104,228.626 ; 54,238.46 73.731,238.46 80.564,231.627 80.564,228.626 ; 54,241 72.626,241 84.361,229.265 84.361,227.37 83.472,226.481 78.419,226.481 78.024,226.875 78.024,228.626 ; 64.944,110.626 61.75,113.82 ; 64.944,124.706 61.75,121.512 61.75,113.82 ; 64.944,145.326 68.786,145.326 69.086,145.626 72.944,145.626 72.944,144.327 ; 64.944,193.626 61.75,196.82 ; 64.944,207.706 61.75,204.512 61.75,196.82 ; 64.944,228.326 68.786,228.326 69.086,228.626 72.944,228.626 72.944,227.327 ; 75.444,149.626 75.444,147.626 75.484,147.586 75.484,145.626 ; 75.444,232.626 75.444,230.626 75.484,230.586 75.484,228.626 ; 86.444,149.626 92.938,156.12 99.19,156.12 99.927,155.384 99.927,148.373 102.162,146.138 102.162,144.37 103.061,143.471 107.293,143.471 108.504,144.683 108.504,145.626 ; 86.444,232.626 92.938,239.12 99.19,239.12 99.927,238.384 99.927,231.373 102.162,229.138 102.162,227.37 103.061,226.471 107.293,226.471 108.504,227.683 108.504,228.626 ; 97.944,154.626 97.944,148.566 100.884,145.626 ; 97.944,237.626 97.944,231.566 100.884,228.626 ; 102.944,154.626 102.944,148.646 105.964,145.626 ; 102.944,237.626 102.944,231.646 105.964,228.626 ; 107,89 93,89 79,89 65,89 24,89 15.475,89 13.675,87.2 12.5,87.2 9,90.7 9,92 9,94.926 6.251,97.675 6.251,106.895 6.886,107.53 8.55,107.53 14.468,113.448 ; 107,94 93,94 79,94 65,94 24,94 ; 107,172 93,172 79,172 65,172 24,172 15.475,172 13.675,170.2 12.5,170.2 9,173.7 9,175 9,177.926 6.251,180.675 6.251,189.895 6.886,190.53 8.55,190.53 14.468,196.448 ; 107,177 93,177 79,177 65,177 24,177 ; 111.044,145.626 107.418,142 103,142 100.884,144.116 100.884,145.626 ; 111.044,228.626 107.418,225 103,225 100.884,227.116 100.884,228.626 ; 14.468,113.448 24.26,123.24 ; 14.468,196.448 24.26,206.24 ; 15,92.631 16.369,94 24,94 ; 15,175.631 16.369,177 24,177 ; 24.26,123.24 24.26,121.208 25.468,120 ; 24.26,206.24 24.26,204.208 25.468,203 ; 25.468,120 44.874,120 51.054,113.82 ; 25.468,203 44.874,203 51.054,196.82 ; 26.657,162.343 100.227,162.343 107.944,154.626 107.944,150.381 108.504,149.821 108.504,145.626 ; 26.657,245.343 100.227,245.343 107.944,237.626 107.944,233.381 108.504,232.821 108.504,228.626 ; 51.054,113.82 61.75,113.82 ; 51.054,113.82 62.424,102.45 69.015,102.45 72.944,106.379 72.944,144.327 ; 51.054,196.82 61.75,196.82 ; 51.054,196.82 62.424,185.45 69.015,185.45 72.944,189.379 72.944,227.327 ; 72.944,144.327 75.568,141.703 96.961,141.703 100.884,145.626 ; 72.944,227.327 75.568,224.703 96.961,224.703 100.884,228.626

## Polygon pours and split planes (outlines as drawn)
no net on Bottom Layer "NONET_L02_P011" (solid, pour order 11): 3,167 3,247 115,247 115,167
no net on Bottom Layer "NONET_L02_P010" (solid, pour order 10): 3,84 3,164 115,164 115,84
no net on Bottom Layer "NONET_L02_P000" (solid, pour order 0): 2,1 2,81 114,81 114,1